# EAGLE board BBB-cape-basic-v00 (EAGLE 6.4)
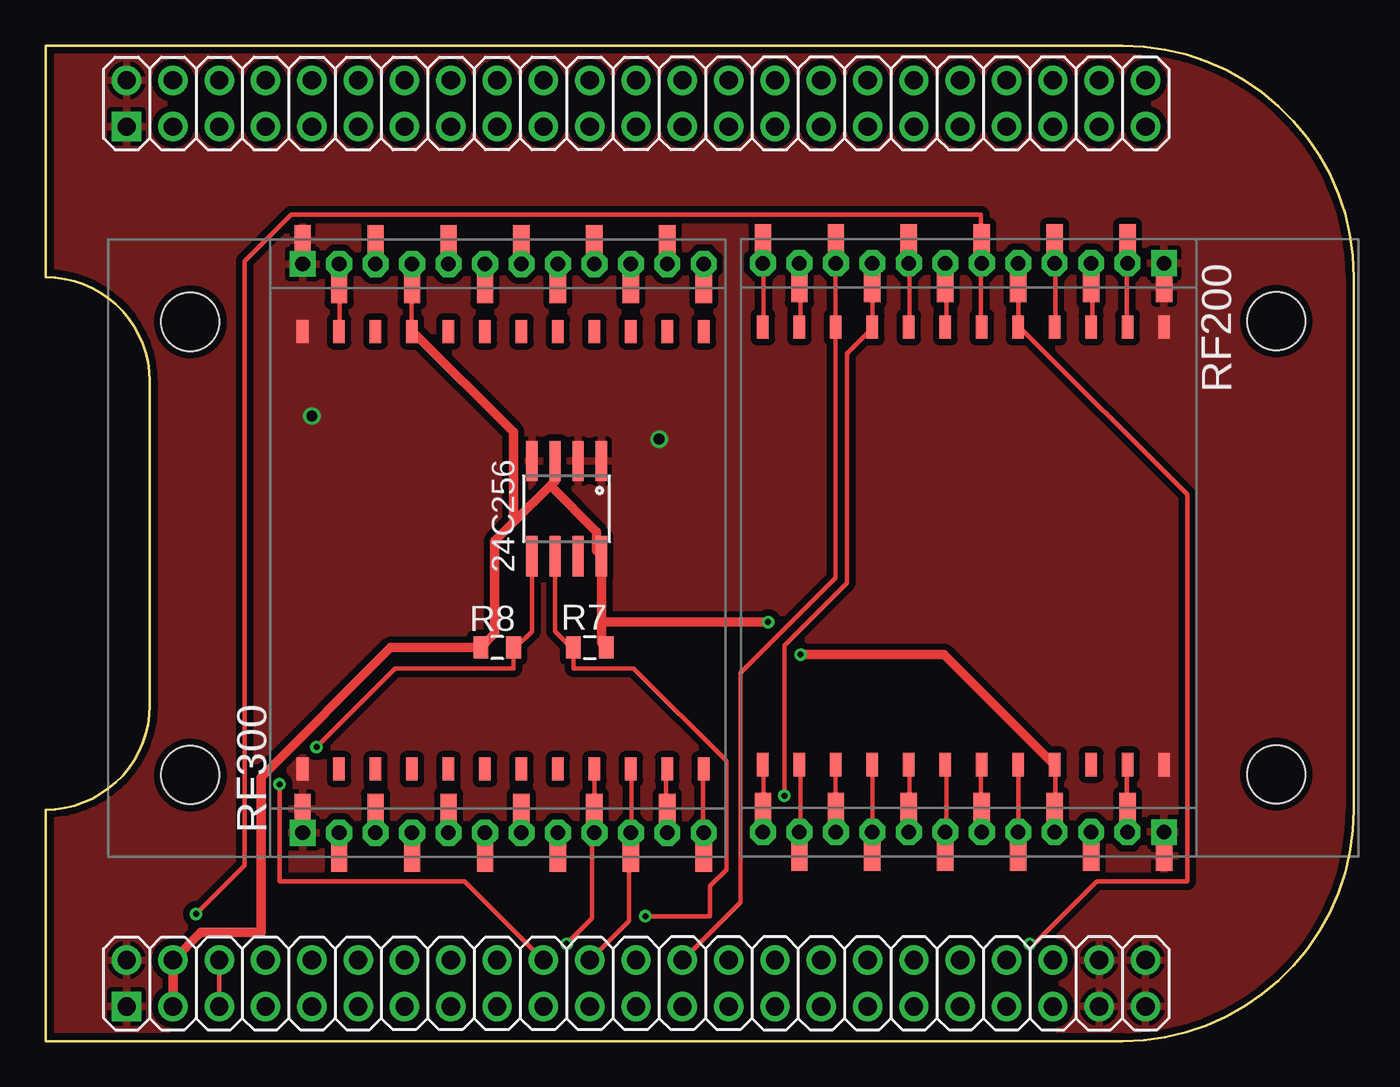
[diagram p0: board, top side]
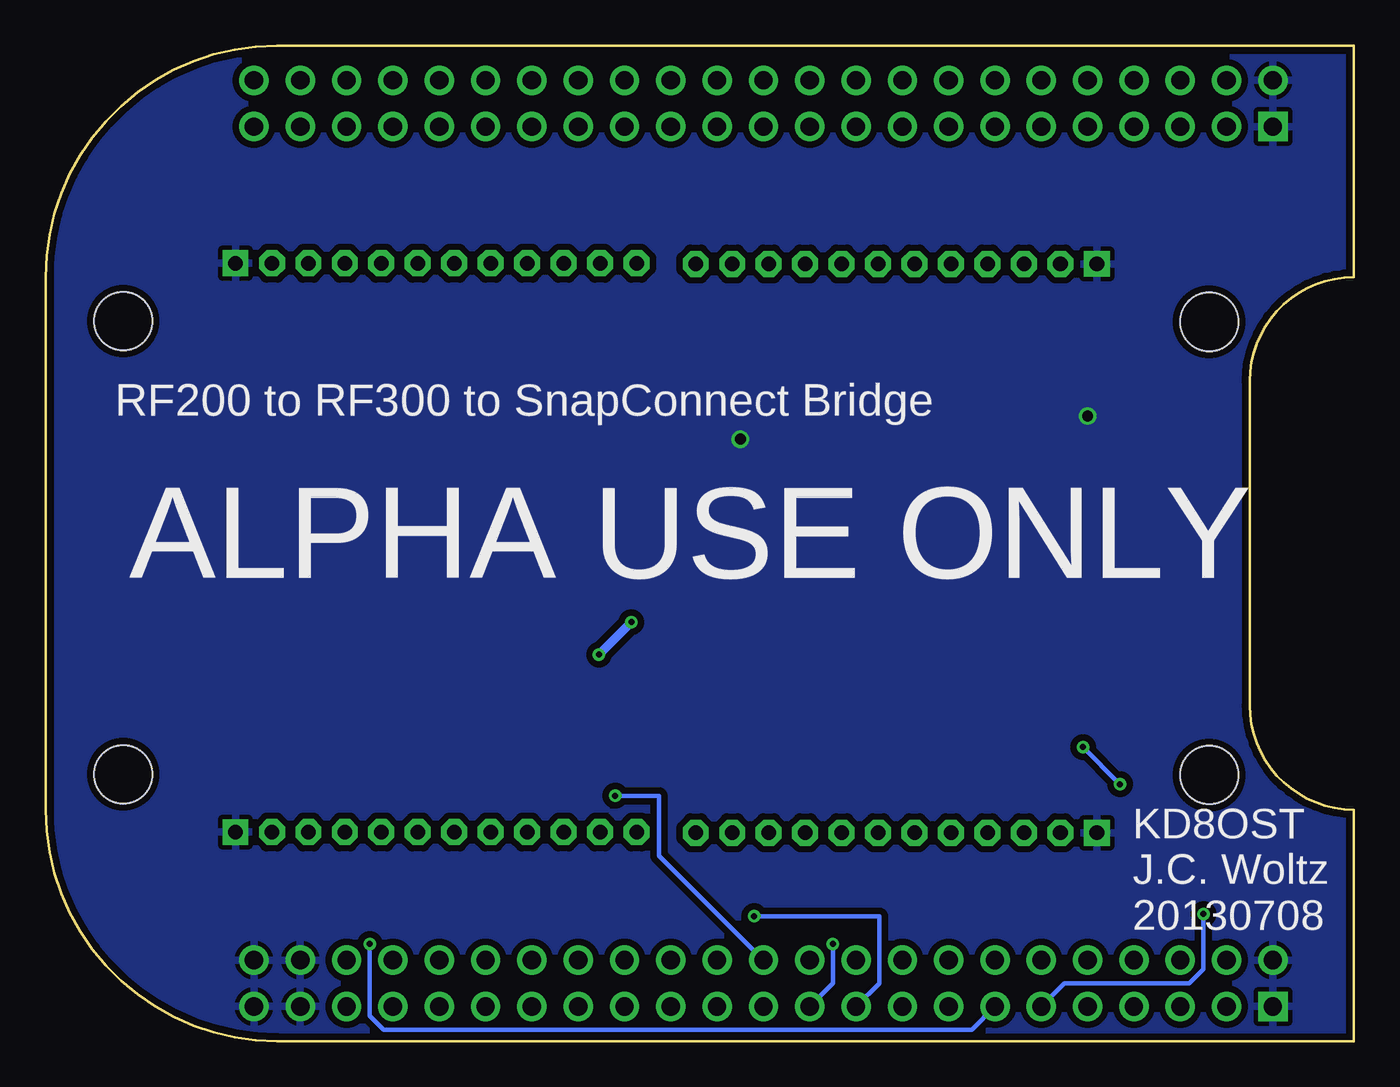
[diagram p1: board, bottom side, seen from below]

Size 71.75 x 54.61 mm. Coordinates in mm from the lower left corner, seen from the top.
Copper layers (1*16): Top 0.0356mm / dielectric 1.5011mm / Bottom 0.0356mm
Design rules "LaenPCBOrder-JCModified": minimum track width 6mil, minimum drill 13mil, track to track 6mil, track to pad 6mil, pad to pad 6mil, via to via 6mil, smd to smd 6mil, copper to edge 15mil, drill to drill 6mil, minimum pad ring 12mil, minimum via ring 7mil, stop-mask expansion 4mil, vias tented up to drill 25mil, thermal gap 10mil
Net classes: 0 default: width 0.254 mm, clearance 0.355 mm; 1 power: width 0.508 mm; 2 smallsig: width 0.152 mm

## Footprints (pad centres in the part's own frame; a part is rotated, then mirrored left to right if it is on the bottom)
SO08 = smd 0.61 x 2.21: 1 -1.905,-2.616; 2 -0.635,-2.616; 3 0.635,-2.616; 4 1.905,-2.616; 5 1.905,2.616; 6 0.635,2.616; 7 -0.635,2.616; 8 -1.905,2.616
0805 = smd 0.8 x 1.2: 1 -0.9,0; 2 0.9,0
SYNAPSERFENGINE-THM-SMT-JACK2 = drill 0.8 square: 1 0,0; 24 31.2,0 | drill 0.8 pad 1.422 octagon: 2 0,-2; 3 0,-4; 4 0,-6; 5 0,-8; 6 0,-10; 7 0,-12; 8 0,-14; 9 0,-16; 10 0,-18; 11 0,-20; 12 0,-22; 13 31.2,-22; 14 31.2,-20; 15 31.2,-18; 16 31.2,-16; 17 31.2,-14; 18 31.2,-12; 19 31.2,-10; 20 31.2,-8; 21 31.2,-6; 22 31.2,-4; 23 31.2,-2 | smd 1.67 x 0.89: P1 1.3,0; P2 -1.3,-2; P3 1.3,-4; P4 -1.3,-6; P5 1.3,-8; P6 -1.3,-10; P7 1.3,-12; P8 -1.3,-14; P9 1.3,-16; P10 -1.3,-18; P11 1.3,-20; P12 -1.3,-22; P13 29.9,-22; P14 32.5,-20; P15 29.9,-18; P16 32.5,-16; P17 29.9,-14; P18 32.5,-12; P19 29.9,-10; P20 32.5,-8; P21 29.9,-6; P22 32.5,-4; P23 29.9,-2; P24 32.5,0 | smd 1.27 x 0.635: P201 3.5,0; P202 3.5,-2; P203 3.5,-4; P204 3.5,-6; P205 3.5,-8; P206 3.5,-10; P207 3.5,-12; P208 3.5,-14; P209 3.5,-16; P210 3.5,-18; P211 3.5,-20; P212 3.5,-22; P213 27.5,-22; P214 27.5,-20; P215 27.5,-18; P216 27.5,-16; P217 27.5,-14; P218 27.5,-12; P219 27.5,-10; P220 27.5,-8; P221 27.5,-6; P222 27.5,-4; P223 27.5,-2; P224 27.5,0 | hole 3.2: 3.17,6.16; 28.03,6.16
BEAGLEBONE_SHIELD = drill 1 square: 1 4.445,19.05; 47 52.705,19.05 | drill 1: 2 1.905,19.05; 3 4.445,21.59; 4 1.905,21.59; 5 4.445,24.13; 6 1.905,24.13; 7 4.445,26.67; 8 1.905,26.67; 9 4.445,29.21; 10 1.905,29.21; 11 4.445,31.75; 12 1.905,31.75; 13 4.445,34.29; 14 1.905,34.29; 15 4.445,36.83; 16 1.905,36.83; 17 4.445,39.37; 18 1.905,39.37; 19 4.445,41.91; 20 1.905,41.91; 21 4.445,44.45; 22 1.905,44.45; 23 4.445,46.99; 24 1.905,46.99; 25 4.445,49.53; 26 1.905,49.53; 27 4.445,52.07; 28 1.905,52.07; 29 4.445,54.61; 30 1.905,54.61; 31 4.445,57.15; 32 1.905,57.15; 33 4.445,59.69; 34 1.905,59.69; 35 4.445,62.23; 36 1.905,62.23; 37 4.445,64.77; 38 1.905,64.77; 39 4.445,67.31; 40 1.905,67.31; 41 4.445,69.85; 42 1.905,69.85; 43 4.445,72.39; 44 1.905,72.39; 45 4.445,74.93; 46 1.905,74.93; 48 50.165,19.05; 49 52.705,21.59; 50 50.165,21.59; 51 52.705,24.13; 52 50.165,24.13; 53 52.705,26.67; 54 50.165,26.67; 55 52.705,29.21; 56 50.165,29.21; 57 52.705,31.75; 58 50.165,31.75; 59 52.705,34.29; 60 50.165,34.29; 61 52.705,36.83; 62 50.165,36.83; 63 52.705,39.37; 64 50.165,39.37; 65 52.705,41.91; 66 50.165,41.91; 67 52.705,44.45; 68 50.165,44.45; 69 52.705,46.99; 70 50.165,46.99; 71 52.705,49.53; 72 50.165,49.53; 73 52.705,52.07; 74 50.165,52.07; 75 52.705,54.61; 76 50.165,54.61; 77 52.705,57.15; 78 50.165,57.15; 79 52.705,59.69; 80 50.165,59.69; 81 52.705,62.23; 82 50.165,62.23; 83 52.705,64.77; 84 50.165,64.77; 85 52.705,67.31; 86 50.165,67.31; 87 52.705,69.85; 88 50.165,69.85; 89 52.705,72.39; 90 50.165,72.39; 91 52.705,74.93; 92 50.165,74.93

## Placement (x,y rotation side)
24C256  EEPROM-I2CSMD  [SO08]  28.57,29.21 180 top
R7  5.6k,5%  [0805]  29.85,21.59 0 top
R8  5.6k,5%  [0805]  24.76,21.59 180 top
RF200  rf200  [SYNAPSERFENGINE-THM-SMT-JACK2]  61.34,42.67 270 top
RF300  rf300  [SYNAPSERFENGINE-THM-SMT-JACK2]  14.1,11.43 90 top
U$1  BEAGLEBONE_OUTLINE  [BEAGLEBONE_SHIELD]  -14.61,54.61 270 top

## Library data of the parts
24C256 RF200 RF300 U$1 = 0_jc-custom-eagle6
R7 R8 = SparkFun-Resistors

## Nets
AIN0: U$1.85
EWP: 24C256.7
GND: 24C256.1 24C256.2 24C256.4 RF200.1 RF200.24 RF200.P1 RF200.P24 RF200.P201 RF200.P224 RF300.1 RF300.24 RF300.P1 RF300.P24 RF300.P201 RF300.P224 U$1.1 U$1.2 U$1.47 U$1.48 U$1.89 U$1.90 U$1.91 U$1.92
GPIO0[23]: U$1.13
GPIO0[26]: U$1.14
GPIO1[12]: U$1.12
GPIO1[13]: U$1.11
GPIO2[2]: U$1.7
GPIO2[3]: U$1.8
GPIO2[4]: U$1.10
GPIO2[5]: U$1.9
I2C1_SCL: U$1.63
I2C1_SDA: U$1.64
I2C2_SCL: 24C256.6 R7.1 U$1.65
I2C2_SDA: 24C256.5 R8.1 U$1.66
N$2: RF200.2 RF200.P2 RF200.P202
N$3: RF200.3 RF200.P3 RF200.P203
N$4: RF200.4 RF200.P4 RF200.P204
N$6: U$1.18
N$7: RF200.7 RF200.P7 RF200.P207
N$8: RF200.8 RF200.P8 RF200.P208
N$9: RF300.11 RF300.P11 RF300.P211
N$10: RF300.12 RF300.P12 RF300.P212
N$11: RF200.11 RF200.P11 RF200.P211
N$12: RF200.12 RF200.P12 RF200.P212
N$14: RF200.23 RF200.P23 RF200.P223
N$15: U$1.16
N$17: RF200.20 RF200.P20 RF200.P220
N$18: RF200.19 RF200.P19 RF200.P219
N$19: RF200.18 RF200.P18 RF200.P218
N$20: RF200.17 RF200.P17 RF200.P217
N$21: RF200.16 RF200.P16 RF200.P216
N$22: RF200.15 RF200.P15 RF200.P215
N$23: RF200.14 RF200.P14 RF200.P214
N$24: RF200.13 RF200.P13 RF200.P213
N$25: RF300.23 RF300.P23 RF300.P223
N$38: U$1.15
N$39: U$1.17
N$40: U$1.19
SYS_5V: U$1.53
U1RX: RF200.10 RF200.P10 RF200.P210 U$1.72
U1TX: RF200.9 RF200.P9 RF200.P209 U$1.70
U2RX: RF300.10 RF300.P10 RF300.P210 U$1.68
U2TX: RF300.9 RF300.P9 RF300.P209 U$1.67
U4RX: RF200.6 RF200.P6 RF200.P206 U$1.57
U4TX: RF200.5 RF200.P5 RF200.P205 U$1.59
VCC3 [power]: 24C256.3 24C256.8 R7.2 R8.2 RF200.21 RF200.P21 RF200.P221 RF300.21 RF300.P21 RF300.P221 U$1.49 U$1.50
VDD_5V: U$1.51 U$1.52

## Tracks (layer width: path | path; a pad name or v marks a point on that pad's centre or on a via)
GND  (via drill 0.6)
  other vias: 14.61,34.29 33.66,33.02
  pour Top: -0.63,54.61 71.75,54.61 71.75,0 -0.63,0
  pour Bottom: -0.63,54.61 71.75,54.61 71.75,0 -0.63,0
I2C2_SCL  (via drill 0.33)
  Top 0.254: 24C256.6 27.94,22.48 28.83,21.59 R7.1 28.96,20.45 32.26,20.45 37.34,15.37 37.34,9.4 36.45,8.51 36.45,6.86 v32.89,6.86
  Bottom 0.254: U$1.65 26.04,3.17 26.04,6.86 v32.89,6.86
I2C2_SDA  (via drill 0.33)
  Top 0.254: 24C256.5 26.67,22.48 25.78,21.59 R8.1 25.65,20.45 19.18,20.45 v14.86,16.13 | U$1.66 22.99,8.76 12.83,8.76 v12.83,14.1
  Bottom 0.254: v14.86,16.13 v12.83,14.1
N$2
  Top 0.254: 59.31,42.67 59.31,39.24 RF200.P202 | 59.31,42.67 59.31,43.94 RF200.P2 | 59.31,42.67 RF200.2
N$3
  Top 0.254: RF200.P203 57.4,39.24 57.4,41.27 RF200.P3 57.4,41.4 57.4,42.67 RF200.3
N$4
  Top 0.254: 55.37,42.67 55.37,39.24 RF200.P204 | 55.37,42.67 55.37,43.94 RF200.P4 | 55.37,42.67 RF200.4
N$7
  Top 0.254: RF200.P207 49.4,39.24 49.4,41.27 RF200.P7 49.4,41.4 49.4,42.67 RF200.7
N$8
  Top 0.254: 47.37,42.67 47.37,39.24 RF200.P208 | 47.37,42.67 47.37,43.94 RF200.P8 | 47.37,42.67 RF200.8
N$9
  Top 0.254: RF300.P211 34.04,14.86 34.04,12.83 RF300.P11 34.04,12.7 34.04,11.43 RF300.11
N$10
  Top 0.254: 36.07,11.43 36.07,14.86 RF300.P212 | 36.07,11.43 36.07,10.16 RF300.P12 | 36.07,11.43 RF300.12
N$11
  Top 0.254: RF200.P211 41.4,39.24 41.4,41.27 RF200.P11 41.4,41.4 41.4,42.67 RF200.11
N$12
  Top 0.254: 39.37,42.67 39.37,39.24 RF200.P212 | 39.37,42.67 39.37,43.94 RF200.P12 | 39.37,42.67 RF200.12
N$14
  Top 0.254: RF200.P223 59.31,15.11 59.31,12.83 RF200.P23 59.31,12.7 59.31,11.56 RF200.23
N$17
  Top 0.254: RF200.P220 53.34,15.11 53.34,11.56 RF200.20 53.34,11.43 53.34,10.29 RF200.P20
N$18
  Top 0.254: RF200.P219 51.31,15.11 51.31,12.83 RF200.P19 51.31,12.7 51.31,11.56 RF200.19
N$19
  Top 0.254: RF200.P218 49.4,15.11 49.4,11.56 RF200.18 49.4,11.43 49.4,10.29 RF200.P18
N$20
  Top 0.254: RF200.P217 47.37,15.11 47.37,12.83 RF200.P17 47.37,12.7 47.37,11.56 RF200.17
N$21
  Top 0.254: RF200.P216 45.34,15.11 45.34,11.56 RF200.16 45.34,11.43 45.34,10.29 RF200.P16
N$22
  Top 0.254: RF200.P215 43.31,15.11 43.31,12.83 RF200.P15 43.31,12.7 43.31,11.56 RF200.15
N$23
  Top 0.254: RF200.P214 41.4,15.11 41.4,11.56 RF200.14 41.4,11.43 41.4,10.29 RF200.P14
N$24
  Top 0.254: RF200.P213 39.37,15.11 39.37,12.83 RF200.P13 39.37,12.7 39.37,11.56 RF200.13
N$25
  Top 0.254: RF300.P223 16.13,38.99 16.13,41.27 RF300.P23 16.13,41.4 16.13,42.55 RF300.23
U1RX
  Top 0.254: 43.31,42.67 43.31,39.24 RF200.P210 43.31,39.12 43.31,25.4 38.1,20.19 38.1,7.62 U$1.72 | 43.31,42.67 43.31,43.94 RF200.P10 | 43.31,42.67 RF200.10
U1TX  (via drill 0.33)
  Top 0.254: RF200.9 45.34,41.4 RF200.P9 45.34,41.27 45.34,39.24 RF200.P209 45.34,39.12 43.94,37.72 43.94,25.15 40.51,21.72 v40.51,13.46
  Bottom 0.254: U$1.70 38.1,10.16 38.1,13.46 v40.51,13.46
U2RX
  Top 0.254: 32.13,11.43 32.13,14.86 RF300.P210 | 32.13,11.43 32.13,10.16 RF300.P10 32,10.03 32,6.6 U$1.68 | 32.13,11.43 RF300.10
U2TX  (via drill 0.33)
  Top 0.254: RF300.P209 30.1,14.86 30.1,12.83 RF300.P9 30.1,12.7 RF300.9 29.97,11.43 29.97,6.73 v28.57,5.33
  Bottom 0.254: U$1.67 28.57,3.17 v28.57,5.33
U4RX  (via drill 0.33)
  Top 0.254: 51.31,42.67 51.31,39.24 RF200.P206 | 51.31,42.67 51.31,43.94 RF200.P6 51.31,44.07 51.31,45.34 13.46,45.34 10.92,42.8 10.92,9.65 v8.25,6.99 | 51.31,42.67 RF200.6
  Bottom 0.254: U$1.57 15.88,3.17 9.02,3.17 8.25,3.94 v8.25,6.99
U4TX  (via drill 0.33)
  Top 0.254: RF200.5 53.34,41.4 RF200.P5 53.34,41.27 53.34,39.24 RF200.P205 53.47,39.12 62.61,29.97 62.61,8.76 57.66,8.76 54.23,5.33 v53.97,5.33
  Bottom 0.254: U$1.59 20.96,0.64 53.21,0.64 53.97,1.4 v53.97,5.33
VCC3  (via drill 0.33)
  Top 0.254: RF200.P221 55.37,15.11 55.37,12.83 RF200.P21 55.37,12.7 55.37,11.56 RF200.21 | RF300.P221 20.07,38.99 20.07,41.27 RF300.P21 20.07,41.4 20.07,42.55 RF300.21
  Top 0.508: U$1.49 U$1.50 8.51,5.97 11.81,5.97 11.81,14.48 18.92,21.59 R8.2 23.88,21.59 24.64,22.35 24.64,27.43 25.78,28.57 | 30.48,22.99 30.48,26.54 24C256.8 30.35,26.8 30.23,26.92 30.23,27.94 27.69,30.48 | 30.48,22.99 30.48,21.84 30.73,21.59 R7.2 | 27.69,30.48 27.94,30.73 24C256.3 | 27.69,30.48 25.78,28.57 | RF300.P221 20.19,38.86 25.65,33.4 25.65,28.7 25.78,28.57 | v41.4,21.21 49.28,21.21 55.24,15.24 RF200.P221 | 30.48,22.99 v39.62,22.99
  Bottom 0.508: v39.62,22.99 v41.4,21.21
VDD_5V
  Top 0.254: U$1.52 U$1.51

## Text on the board
bPlace: RF200 to RF300 to SnapConnect Bridge | ALPHA USE ONLY | KD8OST / J.C. Woltz / 20130708